# Altium PCB TSSOP-14_L5.0-W4.4-P0.65-LS6.4-BL-EP.pcbdoc
Units mm, origin at the board's own origin, x right, y up, seen from the top; angles counter-clockwise.
Board outline 17.95 x 19.82 mm, 2 copper layers (Top Layer, Bottom Layer); 1 components, 0 nets, 15 pads, 4 vias.
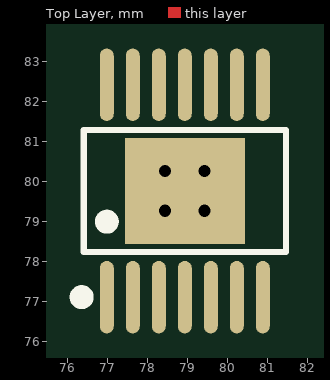
[diagram p0: Top Layer view]
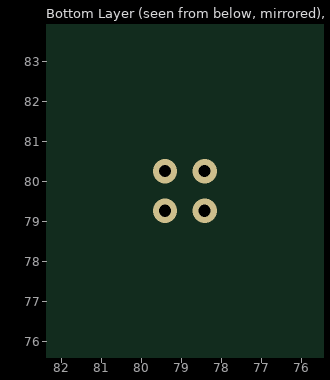
[diagram p1: Bottom Layer view, seen from below]

## Layer stack, top to bottom
Top Layer: signal copper (thickness not stored)
Dielectric: dielectric 0.32, FR-4, Dk 4.8
Bottom Layer: signal copper (thickness not stored)

## Board outline
87.804,69.85 69.85,69.85 69.85,89.668 87.804,89.668

## Components (designator, comment, footprint, x,y, rotation, side; value= is the part's Value field where it differs from the comment)
? "TSSOP-14_L5.0-W4.4-P0.65-LS6.4-BL-EP" TSSOP-14_L5.0-W4.4-P0.65-LS6.4-BL-EP 78.927,79.759 r0 top

## Footprints (in the part's own frame and the unit in brackets; to place one, negate y for a bottom-side part, rotate by r counter-clockwise, add the part's x,y. Pads: shape width x height; smd on the part's side, far side on the other; paste and mask are expansions set on the pad)
TSSOP-14_L5.0-W4.4-P0.65-LS6.4-BL-EP [mm]
  oval 0.35x1.809 smd: 1(-1.95,-2.655) 2(-1.3,-2.655) 3(-0.65,-2.655) 4(0,-2.655) 5(0.65,-2.655) 6(1.3,-2.655) 7(1.95,-2.655) 8(1.95,2.655) 9(1.3,2.655) 10(0.65,2.655) 11(0,2.655) 12(-0.65,2.655) 13(-1.3,2.655) 14(-1.95,2.655)
  rect 3x2.65 smd: 15(0,0)
  silkscreen extent -2.73,-2.8 2.53,1.52

## Via types
v1: diameter 0.61, hole 0.305, Top Layer to Bottom Layer, 4 vias

## Nets (pads, with @x,y where several pads share a name; then routed paths per layer and width w, separated by ;. In a path a pad name is that pad's centre, name@x,y a point inside that pad or via, vN(x,y) a via of type N, cw(c..) or ccw(c..) an arc to the next point about the centre after c; other vN are vias at no path point)
pads on no net: ?.1 ?.2 ?.3 ?.4 ?.5 ?.6 ?.7 ?.8 ?.9 ?.10 ?.11 ?.12 ?.13 ?.14 ?.15
copper on no net:
  other v1: 78.432,79.264 79.423,79.264 78.432,80.254 79.423,80.254